# EAGLE board BMS Segment rev15 (EAGLE 9.6.2), part 1 of 2
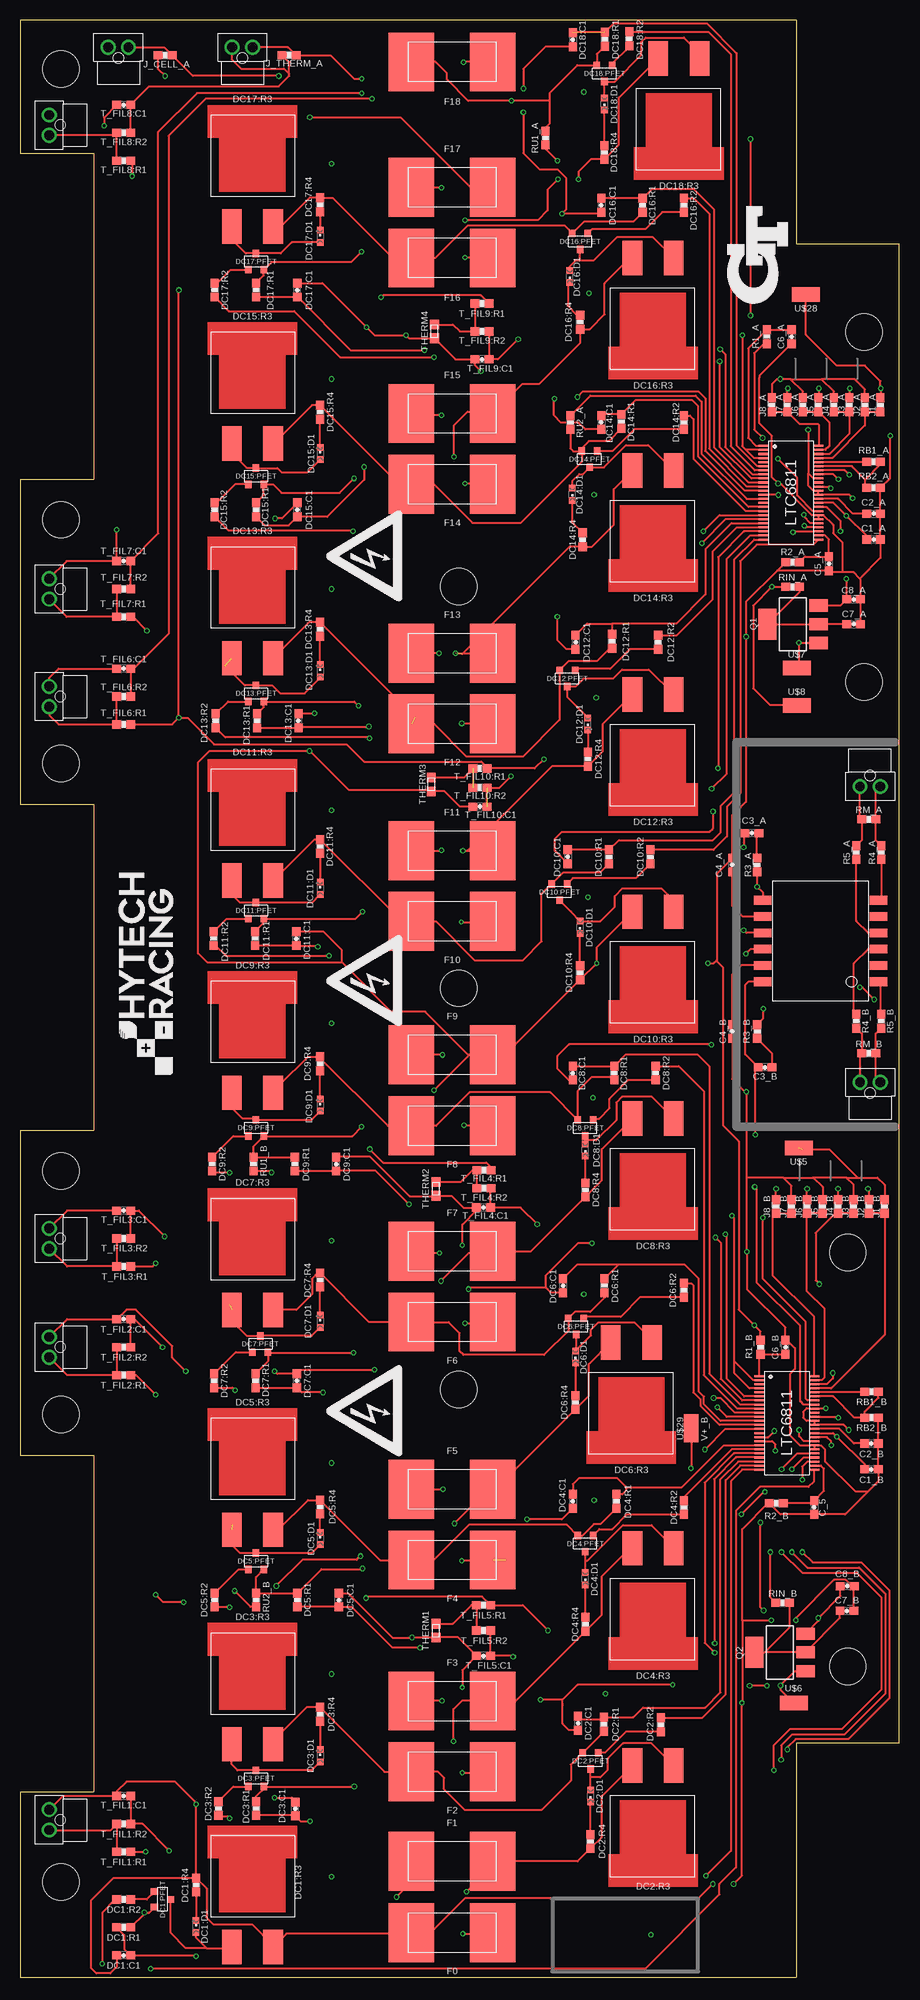
[diagram p0: board, top side]
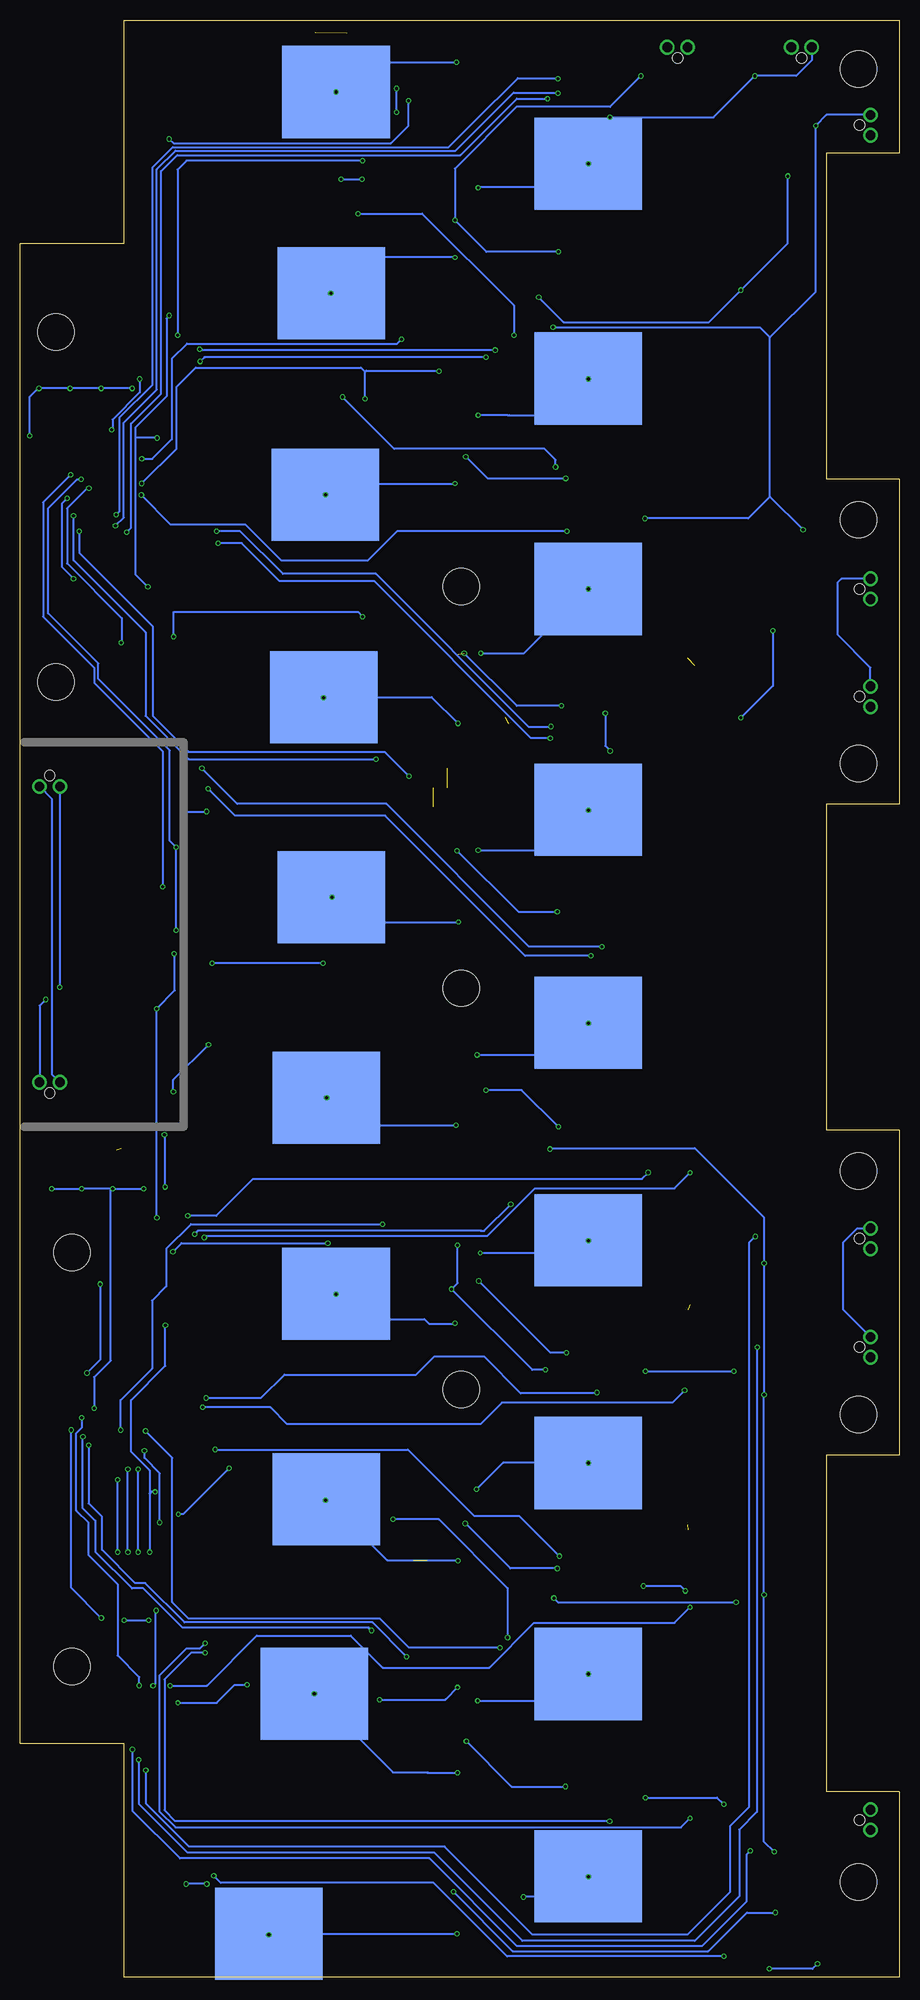
[diagram p1: board, bottom side, seen from below]

Size 108 x 240.25 mm. Coordinates in mm from the lower left corner, seen from the top.
Outline: 9,223.93 9,183.93 0,183.93 0,143.99 9,143.99 9,103.99 0,103.99 0,64.05 9,64.05 9,22.77 0,22.77 0,0 95.3,0 95.3,28.7 108,28.7 108,212.82 95.3,212.82 95.3,240.25 0,240.25 0,223.93 9,223.93
Copper layers (1*16): Top 0.035mm / dielectric 1.5mm / Bottom 0.035mm
Design rules "Advanced Circuits (2 Layer) *": minimum track width 5mil, minimum drill 10mil, track to track 5mil, track to pad 5mil, pad to pad 5mil, via to via 5mil, smd to smd 5mil, copper to edge 10mil, drill to drill 6mil, minimum pad ring 7mil, minimum via ring 5mil, stop-mask expansion 2.5mil, vias tented up to drill 30mil, thermal gap 10mil
Net classes: 1 unfused_hv: clearance 0.025 mm to class 0, clearance 3.2 mm

## Footprints (pad centres in the part's own frame; a part is rotated, then mirrored left to right if it is on the bottom)
NANO-FIT_VERTICAL-2 = drill 1.2: P$1 -1.25,0; P$2 1.25,0 | hole 1.3: 0,-1.34
0603-CAP = smd 1.1 x 1: 1 -0.85,0; 2 0.85,0
KEYSTONE5222 = smd 11.303 x 13.208: 1 0,0
LED-603 = smd 0.8 x 0.8: A 0,-0.75; C 0,0.75
SOT23 = smd 0.8 x 0.9: 1 -0.95,-1; 2 0.95,-1; 3 0,1
0603-RES@1 = smd 1.1 x 1: 1 -0.85,0; 2 0.85,0
PWR263 = smd 2.413 x 4.216: 1 0,0; 2 5.08,0
0885 = smd 5.6 x 7.23: 1 -5,0; 2 5,0
SOT223 = smd 1.5 x 2.235: 1 -2.3,-3.15; 2 0,-3.15; 3 2.3,-3.15 | smd 3.8 x 2.2: 4 0,3.15
0603 = smd 1.2 x 1.1: 1 -0.85,0; 2 0.85,0
HM2102NLT = smd 1.067 x 2.184: P$1 0,0; P$2 2,0; P$3 4,0; P$4 6,0; P$5 8,0; P$6 10,0; P$7 10,14.25; P$8 8,14.25; P$9 6,14.25; P$10 4,14.25; P$11 2,14.25; P$12 0,14.25
LTC6811 = smd 0.25 x 1.25: 1 -5.75,-3.37; 2 -5.25,-3.37; 3 -4.75,-3.37; 4 -4.25,-3.37; 5 -3.75,-3.37; 6 -3.25,-3.37; 7 -2.75,-3.37; 8 -2.25,-3.37; 9 -1.75,-3.37; 10 -1.25,-3.37; 11 -0.75,-3.37; 12 -0.25,-3.37; 13 0.25,-3.37; 14 0.75,-3.37; 15 1.25,-3.37; 16 1.75,-3.37; 17 2.25,-3.37; 18 2.75,-3.37; 19 3.25,-3.37; 20 3.75,-3.37; 21 4.25,-3.37; 22 4.75,-3.37; 23 5.25,-3.37; 24 5.75,-3.37; 25 5.75,3.38; 26 5.25,3.38; 27 4.75,3.38; 28 4.25,3.38; 29 3.75,3.38; 30 3.25,3.38; 31 2.75,3.38; 32 2.25,3.38; 33 1.75,3.38; 34 1.25,3.38; 35 0.75,3.38; 36 0.25,3.38; 37 -0.25,3.38; 38 -0.75,3.38; 39 -1.25,3.38; 40 -1.75,3.38; 41 -2.25,3.38; 42 -2.75,3.38; 43 -3.25,3.38; 44 -3.75,3.38; 45 -4.25,3.38; 46 -4.75,3.38; 47 -5.25,3.38; 48 -5.75,3.38
MICRO_MINIATURE = smd 3.429 x 1.778: 1 0,0
M4_MOUNTING = hole 4.5: 0,0

## Placement (x,y rotation side)
AMS_CELL_TEST  AMS_CELL_TEST  [NANO-FIT_VERTICAL-2]  12.03,236.95 0 top
AMS_THERM_TEST  AMS_THERM_TEST  [NANO-FIT_VERTICAL-2]  27.27,236.95 0 top
C1_A  1uF  [0603-CAP]  104.82,176.52 0 top
C1_B  1uF  [0603-CAP]  104.56,62.34 0 top
C2_A  1uF  [0603-CAP]  104.82,179.69 0 top
C2_B  1uF  [0603-CAP]  104.56,65.52 0 top
C3_A  15pF  [0603-CAP]  89.87,140.45 180 top
C3_B  15pF  [0603-CAP]  91.49,111.7 180 top
C4_A  10nF  [0603-CAP]  87.46,136.55 90 top
C4_B  10nF  [0603-CAP]  87.46,116.11 270 top
C5_A  10nF  [0603-CAP]  99.33,173.54 270 top
C6_A  100nF  [0603-CAP]  94.74,201.42 270 top
C6_B  100nF  [0603-CAP]  93.98,77.34 90 top
C7_A  100nF  [0603-CAP]  102.36,166.12 0 top
C7_B  100nF  [0603-CAP]  101.55,44.96 0 top
C8_A  1uF  [0603-CAP]  102.36,169.16 0 top
C8_B  1uF  [0603-CAP]  101.6,48.01 0 top
C_5  10nF  [0603-CAP]  97.54,57.66 270 top
CELL0  BATTERY_SPRING_KEYSTONE5222  [KEYSTONE5222]  77.47,5.33 270 bottom
CELL1  BATTERY_SPRING_KEYSTONE5222  [KEYSTONE5222]  38.23,12.38 270 bottom
CELL2  BATTERY_SPRING_KEYSTONE5222  [KEYSTONE5222]  71.88,34.8 270 bottom
CELL3  BATTERY_SPRING_KEYSTONE5222  [KEYSTONE5222]  38.23,37.21 270 bottom
CELL4  BATTERY_SPRING_KEYSTONE5222  [KEYSTONE5222]  70.42,58.67 270 bottom
CELL5  BATTERY_SPRING_KEYSTONE5222  [KEYSTONE5222]  38.23,63.12 270 bottom
CELL6  BATTERY_SPRING_KEYSTONE5222  [KEYSTONE5222]  69.22,83.88 270 bottom
CELL7  BATTERY_SPRING_KEYSTONE5222  [KEYSTONE5222]  38.23,90.49 270 bottom
CELL8  BATTERY_SPRING_KEYSTONE5222  [KEYSTONE5222]  70.42,107.95 270 bottom
CELL9  BATTERY_SPRING_KEYSTONE5222  [KEYSTONE5222]  38.23,117.16 270 bottom
CELL10  BATTERY_SPRING_KEYSTONE5222  [KEYSTONE5222]  69.79,132.59 270 bottom
CELL11  BATTERY_SPRING_KEYSTONE5222  [KEYSTONE5222]  38.23,143.32 270 bottom
CELL12  BATTERY_SPRING_KEYSTONE5222  [KEYSTONE5222]  70.74,157.16 270 bottom
CELL13  BATTERY_SPRING_KEYSTONE5222  [KEYSTONE5222]  38.23,170.43 270 bottom
CELL14  BATTERY_SPRING_KEYSTONE5222  [KEYSTONE5222]  70.55,181.99 270 bottom
CELL15  BATTERY_SPRING_KEYSTONE5222  [KEYSTONE5222]  38.23,196.28 270 bottom
CELL16  BATTERY_SPRING_KEYSTONE5222  [KEYSTONE5222]  69.79,206.76 270 bottom
CELL17  BATTERY_SPRING_KEYSTONE5222  [KEYSTONE5222]  38.23,222.63 270 bottom
CELL18  BATTERY_SPRING_KEYSTONE5222  [KEYSTONE5222]  69.22,231.46 270 bottom
DC1:C1  10nF  [0603-CAP]  12.7,2.67 180 top
DC1:D1  RED  [LED-603]  21.59,6.22 0 top
DC1:PFET  P-CHANNEL_MOSFET_DMP3099L-7  [SOT23]  17.48,9.53 270 top
DC1:R1  100R  [0603-RES@1]  12.7,6.1 180 top
DC1:R2  3K3  [0603-RES@1]  12.7,9.53 180 top
DC1:R3  RESISTOR_PWR263_  [PWR263]  25.97,3.68 0 top
DC1:R4  806R  [0603-RES@1]  21.59,11.3 270 top
DC2:C1  10nF  [0603-CAP]  68.52,31.18 270 top
DC2:D1  RED  [LED-603]  70.04,22.23 180 top
DC2:PFET  P-CHANNEL_MOSFET_DMP3099L-7  [SOT23]  70.04,26.54 180 top
DC2:R1  100R  [0603-RES@1]  71.69,31.05 90 top
DC2:R2  3K3  [0603-RES@1]  78.68,30.99 90 top
DC2:R3  RESISTOR_PWR263_  [PWR263]  80.26,25.97 180 top
DC2:R4  806R  [0603-RES@1]  70.04,16.64 90 top
DC3:C1  10nF  [0603-CAP]  33.78,20.64 90 top
DC3:D1  RED  [LED-603]  36.83,27.18 0 top
DC3:PFET  P-CHANNEL_MOSFET_DMP3099L-7  [SOT23]  28.96,24.38 0 top
DC3:R1  100R  [0603-RES@1]  28.96,20.7 270 top
DC3:R2  3K3  [0603-RES@1]  24.32,20.7 270 top
DC3:R3  RESISTOR_PWR263_  [PWR263]  25.97,28.57 0 top
DC3:R4  806R  [0603-RES@1]  36.83,32.26 270 top
DC4:C1  10nF  [0603-CAP]  67.88,58.42 270 top
DC4:D1  RED  [LED-603]  69.41,48.9 180 top
DC4:PFET  P-CHANNEL_MOSFET_DMP3099L-7  [SOT23]  69.41,53.21 180 top
DC4:R1  100R  [0603-RES@1]  73.22,58.42 90 top
DC4:R2  3K3  [0603-RES@1]  81.53,57.66 90 top
DC4:R3  RESISTOR_PWR263_  [PWR263]  80.26,52.64 180 top
DC4:R4  806R  [0603-RES@1]  69.41,43.31 90 top
DC5:C1  10nF  [0603-CAP]  39.12,46.29 90 top
DC5:D1  RED  [LED-603]  36.83,53.85 0 top
DC5:PFET  P-CHANNEL_MOSFET_DMP3099L-7  [SOT23]  28.96,51.05 0 top
DC5:R1  100R  [0603-RES@1]  34.04,46.29 270 top
DC5:R2  3K3  [0603-RES@1]  23.88,46.29 270 top
DC5:R3  RESISTOR_PWR263_  [PWR263]  25.97,54.93 0 top
DC5:R4  806R  [0603-RES@1]  36.83,57.72 270 top
DC6:C1  10nF  [0603-CAP]  66.67,84.9 270 top
DC6:D1  RED  [LED-603]  68.2,76.14 180 top
DC6:PFET  P-CHANNEL_MOSFET_DMP3099L-7  [SOT23]  68.26,79.88 180 top
DC6:R1  100R  [0603-RES@1]  71.75,84.9 90 top
DC6:R2  3K3  [0603-RES@1]  81.53,84.33 90 top
DC6:R3  RESISTOR_PWR263_  [PWR263]  77.6,77.91 180 top
DC6:R4  806R  [0603-RES@1]  68.2,70.55 90 top
DC7:C1  10nF  [0603-CAP]  33.97,73.22 90 top
DC7:D1  RED  [LED-603]  36.83,80.52 0 top
DC7:PFET  P-CHANNEL_MOSFET_DMP3099L-7  [SOT23]  29.46,77.72 0 top
DC7:R1  100R  [0603-RES@1]  28.89,73.22 270 top
DC7:R2  3K3  [0603-RES@1]  23.81,73.22 270 top
DC7:R3  RESISTOR_PWR263_  [PWR263]  25.97,81.92 0 top
DC7:R4  806R  [0603-RES@1]  36.83,85.6 270 top
DC8:C1  10nF  [0603-CAP]  67.88,111 270 top
DC8:D1  RED  [LED-603]  69.41,101.54 180 top
DC8:PFET  P-CHANNEL_MOSFET_DMP3099L-7  [SOT23]  69.41,104.27 180 top
DC8:R1  100R  [0603-RES@1]  72.96,111 90 top
DC8:R2  3K3  [0603-RES@1]  78.04,111 90 top
DC8:R3  RESISTOR_PWR263_  [PWR263]  80.26,105.41 180 top
DC8:R4  806R  [0603-RES@1]  69.41,96.65 90 top
DC9:C1  10nF  [0603-CAP]  38.8,99.82 90 top
DC9:D1  RED  [LED-603]  36.83,107.06 0 top
DC9:PFET  P-CHANNEL_MOSFET_DMP3099L-7  [SOT23]  28.96,104.27 0 top
DC9:R1  100R  [0603-RES@1]  33.72,99.82 270 top
DC9:R2  3K3  [0603-RES@1]  23.56,99.82 270 top
DC9:R3  RESISTOR_PWR263_  [PWR263]  25.97,108.58 0 top
DC9:R4  806R  [0603-RES@1]  36.83,112.14 270 top
DC10:C1  10nF  [0603-CAP]  67.25,137.54 270 top
DC10:D1  RED  [LED-603]  68.77,128.91 180 top
DC10:PFET  P-CHANNEL_MOSFET_DMP3099L-7  [SOT23]  66.23,133.22 180 top
DC10:R1  100R  [0603-RES@1]  72.33,137.54 90 top
DC10:R2  3K3  [0603-RES@1]  77.41,137.54 90 top
DC10:R3  RESISTOR_PWR263_  [PWR263]  80.26,130.81 180 top
DC10:R4  806R  [0603-RES@1]  68.77,123.32 90 top
DC11:C1  10nF  [0603-CAP]  33.91,127.51 90 top
DC11:D1  RED  [LED-603]  36.83,133.68 0 top
DC11:PFET  P-CHANNEL_MOSFET_DMP3099L-7  [SOT23]  28.96,130.94 0 top
DC11:R1  100R  [0603-RES@1]  28.83,127.51 270 top
DC11:R2  3K3  [0603-RES@1]  23.75,127.51 270 top
DC11:R3  RESISTOR_PWR263_  [PWR263]  25.97,134.62 0 top
DC11:R4  806R  [0603-RES@1]  36.83,138.81 270 top
DC12:C1  10nF  [0603-CAP]  68.2,163.89 270 top
DC12:D1  RED  [LED-603]  69.72,153.86 180 top
DC12:PFET  P-CHANNEL_MOSFET_DMP3099L-7  [SOT23]  67.18,159.45 180 top
DC12:R1  100R  [0603-RES@1]  72.71,164.02 90 top
DC12:R2  3K3  [0603-RES@1]  78.36,163.89 90 top
DC12:R3  RESISTOR_PWR263_  [PWR263]  80.26,157.48 180 top
DC12:R4  806R  [0603-RES@1]  69.72,149.54 90 top
DC13:C1  10nF  [0603-CAP]  34.16,154.24 90 top
DC13:D1  RED  [LED-603]  36.83,160.4 0 top
DC13:PFET  P-CHANNEL_MOSFET_DMP3099L-7  [SOT23]  28.96,157.61 0 top
DC13:R1  100R  [0603-RES@1]  29.08,154.24 270 top
DC13:R2  3K3  [0603-RES@1]  24,154.24 270 top
DC13:R3  RESISTOR_PWR263_  [PWR263]  25.97,161.93 0 top
DC13:R4  806R  [0603-RES@1]  36.83,165.48 270 top
DC14:C1  10nF  [0603-CAP]  71.37,190.88 270 top
DC14:D1  RED  [LED-603]  67.82,182.05 180 top
DC14:PFET  P-CHANNEL_MOSFET_DMP3099L-7  [SOT23]  69.91,186.37 180 top
DC14:R1  100R  [0603-RES@1]  73.85,191.01 90 top
DC14:R2  3K3  [0603-RES@1]  81.53,190.88 90 top
DC14:R3  RESISTOR_PWR263_  [PWR263]  80.26,184.98 180 top
DC14:R4  806R  [0603-RES@1]  69.09,176.47 90 top
DC15:C1  10nF  [0603-CAP]  34.04,180.15 90 top
DC15:D1  RED  [LED-603]  36.83,187.07 0 top
DC15:PFET  P-CHANNEL_MOSFET_DMP3099L-7  [SOT23]  28.96,184.28 0 top
DC15:R1  100R  [0603-RES@1]  28.96,180.15 270 top
DC15:R2  3K3  [0603-RES@1]  23.88,180.15 270 top
DC15:R3  RESISTOR_PWR263_  [PWR263]  25.97,188.28 0 top
DC15:R4  806R  [0603-RES@1]  36.83,192.15 270 top
DC16:C1  10nF  [0603-CAP]  71.37,217.55 270 top
DC16:D1  RED  [LED-603]  67.5,208.79 180 top
DC16:PFET  P-CHANNEL_MOSFET_DMP3099L-7  [SOT23]  68.77,213.11 180 top
DC16:R1  100R  [0603-RES@1]  76.45,217.55 90 top
DC16:R2  3K3  [0603-RES@1]  81.53,217.55 90 top
DC16:R3  RESISTOR_PWR263_  [PWR263]  80.26,211.07 180 top
DC16:R4  806R  [0603-RES@1]  68.77,203.2 90 top
DC17:C1  10nF  [0603-CAP]  34.04,207.14 90 top
DC17:D1  RED  [LED-603]  36.83,213.74 0 top
DC17:PFET  P-CHANNEL_MOSFET_DMP3099L-7  [SOT23]  28.96,210.63 0 top
DC17:R1  100R  [0603-RES@1]  28.96,207.14 270 top
DC17:R2  3K3  [0603-RES@1]  23.88,207.14 270 top
DC17:R3  RESISTOR_PWR263_  [PWR263]  25.97,214.95 0 top
DC17:R4  806R  [0603-RES@1]  36.83,217.61 270 top
DC18:C1  10nF  [0603-CAP]  67.88,237.87 270 top
DC18:D1  RED  [LED-603]  71.75,230 180 top
DC18:PFET  P-CHANNEL_MOSFET_DMP3099L-7  [SOT23]  71.75,233.74 180 top
DC18:R1  100R  [0603-RES@1]  71.82,237.93 90 top
DC18:R2  3K3  [0603-RES@1]  74.8,238 90 top
DC18:R3  RESISTOR_PWR263_  [PWR263]  83.44,235.59 180 top
DC18:R4  806R  [0603-RES@1]  71.75,224.03 90 top
F0  0001.2704.11  [0885]  53.05,5.46 180 top
F1  0001.2704.11  [0885]  53.05,14.21 0 top
F2  0001.2704.11  [0885]  53.05,25.21 180 top
F3  0001.2704.11  [0885]  53.05,33.89 0 top
F4  0001.2704.11  [0885]  53.05,51.21 180 top
F5  0001.2704.11  [0885]  53.05,59.89 0 top
F6  0001.2704.11  [0885]  53.05,80.43 180 top
F7  0001.2704.11  [0885]  53.05,89.11 0 top
F8  0001.2704.11  [0885]  53.05,104.51 180 top
F9  0001.2704.11  [0885]  53.05,113.25 0 top
F10  0001.2704.11  [0885]  53.05,129.62 180 top
F11  0001.2704.11  [0885]  53.05,138.3 0 top
F12  0001.2704.11  [0885]  53.05,153.89 180 top
F13  0001.2704.11  [0885]  53.05,162.56 0 top
F14  0001.2704.11  [0885]  53.05,183.3 180 top
F15  0001.2704.11  [0885]  53.05,191.98 0 top
F16  0001.2704.11  [0885]  53.05,211.08 180 top
F17  0001.2704.11  [0885]  53.05,219.76 0 top
F18  0001.2704.11  [0885]  53.05,235.15 180 top
ISOSPI_A  ISOSPI  [NANO-FIT_VERTICAL-2]  104.39,146.19 180 top
ISOSPI_B  ISOSPI  [NANO-FIT_VERTICAL-2]  104.39,109.87 0 top
J1_A  0R  [0603-RES@1]  105.66,193.04 90 top
J1_B  0R  [0603-RES@1]  106.17,94.61 90 top
J2_A  0R  [0603-RES@1]  103.76,193.04 90 top
J2_B  0R  [0603-RES@1]  104.27,94.61 90 top
J3_A  0R  [0603-RES@1]  101.85,193.04 90 top
J3_B  0R  [0603-RES@1]  102.36,94.61 90 top
J4_A  0R  [0603-RES@1]  99.95,193.04 90 top
J4_B  0R  [0603-RES@1]  100.46,94.61 90 top
J5_A  0R  [0603-RES@1]  98.04,193.04 90 top
J5_B  0R  [0603-RES@1]  98.55,94.61 90 top
J6_A  0R  [0603-RES@1]  96.14,193.04 90 top
J6_B  0R  [0603-RES@1]  96.65,94.61 90 top
J7_A  0R  [0603-RES@1]  94.23,193.04 90 top
J7_B  0R  [0603-RES@1]  94.74,94.61 90 top
J8_A  0R  [0603-RES@1]  92.33,193.04 90 top
J8_B  0R  [0603-RES@1]  92.84,94.61 90 top
J_CELL_A  0R  [0603-RES@1]  17.78,235.97 0 top
J_THERM_A  0R  [0603-RES@1]  33.02,235.97 180 top
Q1  NSV1C201MZ4  [SOT223]  94.91,166.1 90 top
Q2  NSV1C201MZ4  [SOT223]  93.32,39.86 90 top
R1_A  100R  [0603-RES@1]  91.69,201.42 90 top
R1_B  100R  [0603-RES@1]  90.93,77.34 270 top
R2_A  100R  [0603-RES@1]  94.87,173.74 0 top
R2_B  100R  [0603-RES@1]  92.88,58.17 0 top
R3_A  402R  [0603-RES@1]  90.51,136.55 90 top
R3_B  402R  [0603-RES@1]  90.51,116.11 270 top
R4_A  22R  [0603-RES@1]  105.75,138.08 90 top
R4_B  22R  [0603-RES@1]  102.7,117.38 270 top
R5_A  22R  [0603-RES@1]  102.7,138.08 90 top
R5_B  22R  [0603-RES@1]  105.75,117.38 270 top
RB1_A  1K2  [0603-RES@1]  104.82,186.04 180 top
RB1_B  1K2  [0603-RES@1]  104.56,71.87 180 top
RB2_A  806R  [0603-RES@1]  104.82,182.87 180 top
RB2_B  806R  [0603-RES@1]  104.56,68.69 180 top
RIN_A  100R  [0603-RES@1]  94.87,170.69 0 top
RIN_B  100R  [0603-RES@1]  93.64,45.97 0 top
RM_A  100R  [0603-RES@1]  104.22,142.14 180 top
RM_B  100R  [0603-RES@1]  104.22,113.44 0 top
RU1_A  100R  [0603-RES@1]  64.52,225.81 270 top
RU1_B  100R  [0603-RES@1]  28.64,99.82 270 top
RU2_A  100R  [0603-RES@1]  67.56,190.88 90 top
RU2_B  100R  [0603-RES@1]  28.96,46.29 270 top
T_FIL1:C1  10nF  [0603-CAP]  12.7,22.23 180 top
T_FIL1:R1  10K  [0603-RES@1]  12.7,15.37 180 top
T_FIL1:R2  100R  [0603-RES@1]  12.7,18.8 180 top
T_FIL2:C1  10nF  [0603-CAP]  12.7,80.77 180 top
T_FIL2:R1  10K  [0603-RES@1]  12.7,73.91 180 top
T_FIL2:R2  100R  [0603-RES@1]  12.7,77.34 180 top
T_FIL3:C1  10nF  [0603-CAP]  12.7,94.11 180 top
T_FIL3:R1  10K  [0603-RES@1]  12.7,87.25 180 top
T_FIL3:R2  100R  [0603-RES@1]  12.7,90.68 180 top
T_FIL4:C1  10nF  [0603-CAP]  56.9,94.49 180 top
T_FIL4:R1  10K  [0603-RES@1]  56.96,99.06 180 top
T_FIL4:R2  100R  [0603-RES@1]  56.96,96.84 180 top
T_FIL5:C1  10nF  [0603-CAP]  56.9,39.43 180 top
T_FIL5:R1  10K  [0603-RES@1]  56.9,45.66 180 top
T_FIL5:R2  100R  [0603-RES@1]  56.9,42.55 180 top
T_FIL6:C1  10nF  [0603-CAP]  12.7,160.66 180 top
T_FIL6:R1  10K  [0603-RES@1]  12.7,153.8 180 top
T_FIL6:R2  100R  [0603-RES@1]  12.7,157.23 180 top
T_FIL7:C1  10nF  [0603-CAP]  12.7,173.86 180 top
T_FIL7:R1  10K  [0603-RES@1]  12.7,167 180 top
T_FIL7:R2  100R  [0603-RES@1]  12.7,170.43 180 top
T_FIL8:C1  10nF  [0603-CAP]  12.7,229.87 180 top
T_FIL8:R1  10K  [0603-RES@1]  12.7,223.01 180 top
T_FIL8:R2  100R  [0603-RES@1]  12.7,226.44 180 top
T_FIL9:C1  10nF  [0603-CAP]  56.71,198.63 180 top
T_FIL9:R1  10K  [0603-RES@1]  56.71,205.49 180 top
T_FIL9:R2  100R  [0603-RES@1]  56.71,202.06 180 top
T_FIL10:C1  10nF  [0603-CAP]  56.45,143.7 180 top
T_FIL10:R1  10K  [0603-RES@1]  56.45,148.4 180 top
T_FIL10:R2  100R  [0603-RES@1]  56.45,146.05 180 top
THERM1  10K  [0603]  51.05,42.55 90 top
THERM1_A  THERMISTOR  [NANO-FIT_VERTICAL-2]  3.56,157.23 90 top
THERM1_B  THERMISTOR  [NANO-FIT_VERTICAL-2]  3.56,19.3 90 top
THERM2  10K  [0603]  51.05,96.77 90 top
THERM2_A  THERMISTOR  [NANO-FIT_VERTICAL-2]  3.56,170.43 90 top
THERM2_B  THERMISTOR  [NANO-FIT_VERTICAL-2]  3.56,77.34 90 top
THERM3  10K  [0603]  50.48,146.43 90 top
THERM3_A  THERMISTOR  [NANO-FIT_VERTICAL-2]  3.56,227.39 90 top
THERM3_B  THERMISTOR  [NANO-FIT_VERTICAL-2]  3.56,90.68 90 top
THERM4  10K  [0603]  50.86,202.06 90 top
TRANSFORMER  HM2102NLT  [HM2102NLT]  105.44,122.21 90 top
U1  LTC6811-2  [LTC6811]  94.66,182.26 270 top
U2  LTC6811-2  [LTC6811]  94.15,68.05 270 top
U$1  [LOGO_HYTECH_1.0"]  19.05,110.49 90 top
U$2  [LOGO_GT_0.50"]  90.55,211.46 90 top
U$3  [HV_1.00"]  42.23,122.36 90 top
U$4  [HV_1.00"]  42.23,69.53 90 top
U$5  TEST_POINTMICRO_MINIATURE  [MICRO_MINIATURE]  95.63,101.79 180 top
U$6  TEST_POINTMICRO_MINIATURE  [MICRO_MINIATURE]  95,33.66 180 top
U$7  TEST_POINTMICRO_MINIATURE  [MICRO_MINIATURE]  95.38,160.72 0 top
U$8  TEST_POINTMICRO_MINIATURE  [MICRO_MINIATURE]  95.38,156.15 0 top
U$9  [M4_MOUNTING]  53.85,170.71 0 top
U$10  [M4_MOUNTING]  5,178.94 0 top
U$11  [M4_MOUNTING]  5,98.99 0 top
U$12  [M4_MOUNTING]  5,69.05 0 top
U$13  [M4_MOUNTING]  5,11.67 0 top
U$14  [M4_MOUNTING]  101.65,38.11 0 top
U$15  [M4_MOUNTING]  103.65,201.99 0 top
U$16  [M4_MOUNTING]  103.65,158.99 0 top
U$17  [M4_MOUNTING]  101.65,88.99 0 top
U$18  [M4_MOUNTING]  53.85,72.14 0 top
U$19  [M4_MOUNTING]  53.85,121.41 0 top
U$20  [HV_1.00"]  42.23,174.5 90 top
U$21  [NUMBER]  65.34,0.7 0 top
U$26  [M4_MOUNTING]  5,234.28 0 top
U$27  [M4_MOUNTING]  5,148.99 0 top
U$28  TEST_POINTMICRO_MINIATURE  [MICRO_MINIATURE]  96.52,206.57 180 top
U$29  TEST_POINTMICRO_MINIATURE  [MICRO_MINIATURE]  82.42,67.37 90 top

## Library data of the parts
AMS_CELL_TEST AMS_THERM_TEST DC1:PFET DC2:PFET DC3:PFET DC4:PFET DC5:PFET DC6:PFET DC7:PFET DC8:PFET DC9:PFET DC10:PFET DC11:PFET DC12:PFET DC13:PFET DC14:PFET DC15:PFET DC16:PFET DC17:PFET DC18:PFET ISOSPI_A ISOSPI_B Q1 Q2 THERM1 THERM1_A THERM1_B THERM2 THERM2_A THERM2_B THERM3 THERM3_A THERM3_B THERM4 TRANSFORMER U1 U2 U$9-U$19 U$26 U$27 = HyTechDevices
C1_A C1_B C2_A C2_B C3_A C3_B C4_A C4_B C5_A C8_A C8_B C_5 DC1:C1 DC2:C1 DC3:C1 DC4:C1 DC5:C1 DC6:C1 DC7:C1 DC8:C1 DC9:C1 DC10:C1 DC11:C1 DC12:C1 DC13:C1 DC14:C1 DC15:C1 DC16:C1 DC17:C1 DC18:C1 T_FIL1:C1 T_FIL2:C1 T_FIL3:C1 T_FIL4:C1 T_FIL5:C1 T_FIL6:C1 T_FIL7:C1 T_FIL8:C1 T_FIL9:C1 T_FIL10:C1 = HyTechDevices; TOLERANCE: 5%; VOLTAGE: 10V
C6_A C6_B C7_A C7_B = HyTechDevices; TOLERANCE: 5%; VOLTAGE: 50V
CELL0 CELL1-CELL18 U$5-U$8 U$28 U$29 = HyTechDevices - Copy
DC1:D1 DC2:D1 DC3:D1 DC4:D1 DC5:D1 DC6:D1 DC7:D1 DC8:D1 DC9:D1 DC10:D1 DC11:D1 DC12:D1 DC13:D1 DC14:D1 DC15:D1 DC16:D1 DC17:D1 DC18:D1 = HyTechDevices; DKPN: 350-2038-1-ND
DC1:R1 DC1:R2 DC1:R4 DC2:R1 DC2:R2 DC2:R4 DC3:R1 DC3:R2 DC3:R4 DC4:R1 DC4:R2 DC4:R4 DC5:R1 DC5:R2 DC5:R4 DC6:R1 DC6:R2 DC6:R4 DC7:R1 DC7:R2 DC7:R4 DC8:R1 DC8:R2 DC8:R4 DC9:R1 DC9:R2 DC9:R4 DC10:R1 DC10:R2 DC10:R4 DC11:R1 DC11:R2 DC11:R4 DC12:R1 DC12:R2 DC12:R4 DC13:R1 DC13:R2 DC13:R4 DC14:R1 DC14:R2 DC14:R4 DC15:R1 DC15:R2 DC15:R4 DC16:R1 DC16:R2 DC16:R4 DC17:R1 DC17:R2 DC17:R4 DC18:R1 DC18:R2 DC18:R4 J1_A J1_B J2_A J2_B J3_A J3_B J4_A J4_B J5_A J5_B J6_A J6_B J7_A J7_B J8_A J8_B R1_A R1_B R2_A R2_B R3_A R3_B R4_A R4_B R5_A R5_B RB1_A RB1_B RB2_A RB2_B RIN_A RIN_B RU1_A RU1_B RU2_A RU2_B T_FIL1:R1 T_FIL1:R2 T_FIL2:R1 T_FIL2:R2 T_FIL3:R1 T_FIL3:R2 T_FIL4:R1 T_FIL4:R2 T_FIL5:R1 T_FIL5:R2 T_FIL6:R1 T_FIL6:R2 T_FIL7:R1 T_FIL7:R2 T_FIL8:R1 T_FIL8:R2 T_FIL9:R1 T_FIL9:R2 T_FIL10:R1 T_FIL10:R2 = HyTechDevices; TOLERANCE: 1%
DC1:R3 DC2:R3 DC3:R3 DC4:R3 DC5:R3 DC6:R3 DC7:R3 DC8:R3 DC9:R3 DC10:R3 DC11:R3 DC12:R3 DC13:R3 DC14:R3 DC15:R3 DC16:R3 DC17:R3 DC18:R3 = HyTechDevices; RESISTANCE: 5R
F0 F1-F18 = HyTechDevices; CURRENT: 1.25A; DKPN: F10986CT-ND; MANUFACTURER: Littelfuse Inc.; MOPN: 576-08851.25DR; MPN: 08851.25DR; RATING: 1A
J_CELL_A J_THERM_A = HyTechDevices; TOLERANCE: 1%; TYPE: JUMPER
RM_A RM_B = HyTechDevices; TOLERANCE: 1%; TYPE: TERMINATION
U$1-U$4 U$20 U$21 = HyTechAesthetics

## Nets
C0_A: C5_A.1 R2_A.2 U1.26
C0_B: C_5.1 R2_B.2 U2.26
C1_A: DC10:C1.1 DC10:R1.2 U1.24
C1_B: DC1:C1.1 DC1:R1.2 U2.24
C2_A: DC11:C1.1 DC11:R1.2 U1.22
C2_B: DC2:C1.1 DC2:R1.2 U2.22
C3_A: DC12:C1.1 DC12:R1.2 U1.20
C3_B: DC3:C1.1 DC3:R1.2 U2.20
C4_A: DC13:C1.1 DC13:R1.2 U1.18
C4_B: DC4:C1.1 DC4:R1.2 U2.18
C5_A: DC14:C1.1 DC14:R1.2 U1.16
C5_B: DC5:C1.1 DC5:R1.2 U2.16
C7_A: DC15:C1.1 DC15:R1.2 U1.12
C7_B: DC6:C1.1 DC6:R1.2 U2.12
C8_A: DC16:C1.1 DC16:R1.2 U1.10
C8_B: DC7:C1.1 DC7:R1.2 U2.10
C9_A: DC17:C1.1 DC17:R1.2 U1.8
C9_B: DC8:C1.1 DC8:R1.2 U2.8
C10_A: DC18:C1.1 DC18:R1.2 U1.6
C10_B: DC9:C1.1 DC9:R1.2 U2.6
CC0 [unfused_hv]: CELL0.1 F0.1
CC1 [unfused_hv]: CELL1.1 F1.1
CC2 [unfused_hv]: CELL2.1 F2.1
CC3 [unfused_hv]: CELL3.1 F3.1
CC4 [unfused_hv]: CELL4.1 F4.1
CC5 [unfused_hv]: CELL5.1 F5.1
CC6 [unfused_hv]: CELL6.1 F6.1
CC7 [unfused_hv]: CELL7.1 F7.1
CC8 [unfused_hv]: CELL8.1 F8.1
CC9 [unfused_hv]: CELL9.1 F9.1
CC10 [unfused_hv]: CELL10.1 F10.1
CC11 [unfused_hv]: CELL11.1 F11.1
CC12 [unfused_hv]: CELL12.1 F12.1
CC13 [unfused_hv]: CELL13.1 F13.1
CC14 [unfused_hv]: CELL14.1 F14.1
CC15 [unfused_hv]: CELL15.1 F15.1
CC16 [unfused_hv]: CELL16.1 F16.1
CC17 [unfused_hv]: CELL17.1 F17.1
CC18 [unfused_hv]: CELL18.1 F18.1
DC1:GATE: DC1:PFET.1 DC1:R2.1
DC1:N$1: DC1:D1.A DC1:PFET.3 DC1:R3.1
DC1:N$2: DC1:D1.C DC1:R4.2
DC2:GATE: DC2:PFET.1 DC2:R2.1
DC2:N$1: DC2:D1.A DC2:PFET.3 DC2:R3.1
DC2:N$2: DC2:D1.C DC2:R4.2
DC3:GATE: DC3:PFET.1 DC3:R2.1
DC3:N$1: DC3:D1.A DC3:PFET.3 DC3:R3.1
DC3:N$2: DC3:D1.C DC3:R4.2
DC4:GATE: DC4:PFET.1 DC4:R2.1
DC4:N$1: DC4:D1.A DC4:PFET.3 DC4:R3.1
DC4:N$2: DC4:D1.C DC4:R4.2
DC5:GATE: DC5:PFET.1 DC5:R2.1
DC5:N$1: DC5:D1.A DC5:PFET.3 DC5:R3.1
DC5:N$2: DC5:D1.C DC5:R4.2
DC6:GATE: DC6:PFET.1 DC6:R2.1
DC6:N$1: DC6:D1.A DC6:PFET.3 DC6:R3.1
DC6:N$2: DC6:D1.C DC6:R4.2
DC7:GATE: DC7:PFET.1 DC7:R2.1
DC7:N$1: DC7:D1.A DC7:PFET.3 DC7:R3.1
DC7:N$2: DC7:D1.C DC7:R4.2
DC8:GATE: DC8:PFET.1 DC8:R2.1
DC8:N$1: DC8:D1.A DC8:PFET.3 DC8:R3.1
DC8:N$2: DC8:D1.C DC8:R4.2
DC9:GATE: DC9:PFET.1 DC9:R2.1
DC9:N$1: DC9:D1.A DC9:PFET.3 DC9:R3.1
DC9:N$2: DC9:D1.C DC9:R4.2
DC10:GATE: DC10:PFET.1 DC10:R2.1
DC10:N$1: DC10:D1.A DC10:PFET.3 DC10:R3.1
DC10:N$2: DC10:D1.C DC10:R4.2
DC11:GATE: DC11:PFET.1 DC11:R2.1
DC11:N$1: DC11:D1.A DC11:PFET.3 DC11:R3.1
DC11:N$2: DC11:D1.C DC11:R4.2
DC12:GATE: DC12:PFET.1 DC12:R2.1
DC12:N$1: DC12:D1.A DC12:PFET.3 DC12:R3.1
DC12:N$2: DC12:D1.C DC12:R4.2
DC13:GATE: DC13:PFET.1 DC13:R2.1
DC13:N$1: DC13:D1.A DC13:PFET.3 DC13:R3.1
DC13:N$2: DC13:D1.C DC13:R4.2
DC14:GATE: DC14:PFET.1 DC14:R2.1
DC14:N$1: DC14:D1.A DC14:PFET.3 DC14:R3.1
DC14:N$2: DC14:D1.C DC14:R4.2
DC15:GATE: DC15:PFET.1 DC15:R2.1
DC15:N$1: DC15:D1.A DC15:PFET.3 DC15:R3.1
DC15:N$2: DC15:D1.C DC15:R4.2
DC16:GATE: DC16:PFET.1 DC16:R2.1
DC16:N$1: DC16:D1.A DC16:PFET.3 DC16:R3.1
DC16:N$2: DC16:D1.C DC16:R4.2
DC17:GATE: DC17:PFET.1 DC17:R2.1
DC17:N$1: DC17:D1.A DC17:PFET.3 DC17:R3.1
DC17:N$2: DC17:D1.C DC17:R4.2
DC18:GATE: DC18:PFET.1 DC18:R2.1
DC18:N$1: DC18:D1.A DC18:PFET.3 DC18:R3.1
DC18:N$2: DC18:D1.C DC18:R4.2
DRIVE_A: Q1.1 U1.38 U$7.1
DRIVE_B: Q2.1 U2.38 U$6.1
GPIO1_A: T_FIL6:C1.1 T_FIL6:R2.1 U1.27
GPIO1_B: T_FIL1:C1.1 T_FIL1:R2.1 U2.27
GPIO2_A: T_FIL7:C1.1 T_FIL7:R2.1 U1.28
GPIO2_B: T_FIL2:C1.1 T_FIL2:R2.1 U2.28
GPIO3_A_POST: AMS_THERM_TEST.P$2 J_THERM_A.1 U1.29
GPIO3_A_PRE: AMS_THERM_TEST.P$1 J_THERM_A.2 T_FIL8:C1.1 T_FIL8:R2.1
GPIO3_B: T_FIL3:C1.1 T_FIL3:R2.1 U2.29
GPIO4_A: T_FIL9:C1.1 T_FIL9:R2.1 U1.32
GPIO4_B: T_FIL4:C1.1 T_FIL4:R2.1 U2.32
GPIO5_A: T_FIL10:C1.1 T_FIL10:R2.1 U1.33
GPIO5_B: T_FIL5:C1.1 T_FIL5:R2.1 U2.33
IM_A: C3_A.2 TRANSFORMER.P$9 U1.41
IM_B: C3_B.2 TRANSFORMER.P$12 U2.41
IP_A: R3_A.1 TRANSFORMER.P$7 U1.42
IP_B: R3_B.1 TRANSFORMER.P$10 U2.42
ISOSPI-M: ISOSPI_A.P$2 ISOSPI_B.P$2 R5_A.2 R5_B.2 RM_A.2 RM_B.2
ISOSPI-P: ISOSPI_A.P$1 ISOSPI_B.P$1 R4_A.2 R4_B.2 RM_A.1 RM_B.1
N$1: C4_B.1 TRANSFORMER.P$11
N$2: RB1_B.2 U2.44
N$3: T_FIL1:R1.2 T_FIL1:R2.2 THERM1_B.P$1
N$4: RB1_B.1 RB2_B.2 U2.43
N$5: R4_B.1 TRANSFORMER.P$3
N$6: RB1_A.2 U1.44
N$7: R5_B.1 TRANSFORMER.P$1
N$8: J7_B.1 J8_B.1 U2.48
N$9: J5_B.1 J6_B.1 U2.47
N$10: C3_B.1 R3_B.2
N$13: J3_B.1 J4_B.1 U2.46
N$16: J1_B.1 J2_B.1 U2.45
N$17: T_FIL5:R1.2 T_FIL5:R2.2 THERM1.2
N$18: T_FIL2:R1.2 T_FIL2:R2.2 THERM2_B.P$1
N$19: T_FIL4:R1.2 T_FIL4:R2.2 THERM2.2
N$20: RB1_A.1 RB2_A.2 U1.43
N$21: C4_A.1 TRANSFORMER.P$8
N$22: R4_A.1 TRANSFORMER.P$6
N$23: R5_A.1 TRANSFORMER.P$4
N$24: C3_A.1 R3_A.2
N$26: T_FIL3:R1.2 T_FIL3:R2.2 THERM3_B.P$1
N$30: J7_A.1 J8_A.1 U1.48
N$31: J5_A.1 J6_A.1 U1.47
N$32: J3_A.1 J4_A.1 U1.46
N$33: J1_A.1 J2_A.1 U1.45
N$34: T_FIL9:R1.2 T_FIL9:R2.2 THERM4.2
N$35: T_FIL8:R1.2 T_FIL8:R2.2 THERM3_A.P$1
N$36: T_FIL10:R1.2 T_FIL10:R2.2 THERM3.2
N$37: T_FIL7:R1.2 T_FIL7:R2.2 THERM2_A.P$1
N$38: T_FIL6:R1.2 T_FIL6:R2.2 THERM1_A.P$1
S1_A: DC10:R2.2 U1.25
S1_B: DC1:R2.2 U2.25
S2_A: DC11:R2.2 U1.23
S2_B: DC2:R2.2 U2.23
S3_A: DC12:R2.2 U1.21
S3_B: DC3:R2.2 U2.21
S4_A: DC13:R2.2 U1.19
S4_B: DC4:R2.2 U2.19
S5_A: DC14:R2.2 U1.17
S5_B: DC5:R2.2 U2.17
S7_A: DC15:R2.2 U1.13
S7_B: DC6:R2.2 U2.13
S8_A: DC16:R2.2 U1.11
S8_B: DC7:R2.2 U2.11
S9_A: DC17:R2.2 U1.9
S9_B: DC8:R2.2 U2.9
S10_A: DC18:R2.2 U1.7
S10_B: DC9:R2.2 U2.7
SENSE1: DC1:PFET.2 DC1:R1.1 DC2:R3.2 DC2:R4.1 F1.2
SENSE2: DC2:PFET.2 DC2:R1.1 DC3:R3.2 DC3:R4.1 F2.2
SENSE3: DC3:PFET.2 DC3:R1.1 DC4:R3.2 DC4:R4.1 F3.2
SENSE4: DC4:PFET.2 DC4:R1.1 DC5:R3.2 DC5:R4.1 F4.2
SENSE5: DC5:PFET.2 DC5:R1.1 DC6:R3.2 DC6:R4.1 F5.2 RU2_B.1
SENSE6: DC6:PFET.2 DC6:R1.1 DC7:R3.2 DC7:R4.1 F6.2
SENSE7: DC7:PFET.2 DC7:R1.1 DC8:R3.2 DC8:R4.1 F7.2
SENSE8: DC8:PFET.2 DC8:R1.1 DC9:R3.2 DC9:R4.1 F8.2
SENSE10: DC10:PFET.2 DC10:R1.1 DC11:R3.2 DC11:R4.1 F10.2
SENSE11: DC11:PFET.2 DC11:R1.1 DC12:R3.2 DC12:R4.1 F11.2
SENSE12: DC12:PFET.2 DC12:R1.1 DC13:R3.2 DC13:R4.1 F12.2
SENSE13: DC13:PFET.2 DC13:R1.1 DC14:R3.2 DC14:R4.1 F13.2
SENSE14: DC14:PFET.2 DC14:R1.1 DC15:R3.2 DC15:R4.1 F14.2 RU2_A.1
SENSE15: DC15:PFET.2 DC15:R1.1 DC16:R3.2 DC16:R4.1 F15.2
SENSE16: DC16:PFET.2 DC16:R1.1 DC17:R3.2 DC17:R4.1 F16.2
SENSE17_POST: AMS_CELL_TEST.P$2 DC17:PFET.2 DC17:R1.1 DC18:R3.2 DC18:R4.1 J_CELL_A.2
SENSE17_PRE: AMS_CELL_TEST.P$1 F17.2 J_CELL_A.1
SENSE18: DC18:PFET.2 DC18:R1.1 F18.2 R1_A.1 RIN_A.1 RU1_A.1 U$8.1
UNUSED1_A: RU1_A.2 U1.2 U1.4
UNUSED1_B: RU1_B.2 U2.2 U2.4
UNUSED2_A: RU2_A.2 U1.14
UNUSED2_B: RU2_B.2 U2.14
V+_A: C6_A.1 R1_A.2 U1.1
V+_B: C6_B.1 R1_B.2 U2.1
V-_A: C1_A.2 C2_A.2 C4_A.2 C5_A.2 C6_A.2 C7_A.2 C8_A.2 DC9:PFET.2 DC9:R1.1 DC10:C1.2 DC10:R3.2 DC10:R4.1 DC11:C1.2 DC12:C1.2 DC13:C1.2 DC14:C1.2 DC15:C1.2 DC16:C1.2 DC17:C1.2 DC18:C1.2 F9.2 J1_A.2 J3_A.2 J5_A.2 J7_A.2 R1_B.1 R2_A.1 RB2_A.1 RIN_B.1 RU1_B.1 T_FIL6:C1.2 T_FIL7:C1.2 T_FIL8:C1.2 T_FIL9:C1.2 T_FIL10:C1.2 THERM1_A.P$2 THERM2_A.P$2 THERM3.1 THERM3_A.P$2 THERM4.1 U1.30 U1.31 U$28.1 U$29.1
V-_B: C1_B.2 C2_B.2 C4_B.2 C6_B.2 C7_B.2 C8_B.2 C_5.2 DC1:C1.2 DC1:R3.2 DC1:R4.1 DC2:C1.2 DC3:C1.2 DC4:C1.2 DC5:C1.2 DC6:C1.2 DC7:C1.2 DC8:C1.2 DC9:C1.2 F0.2 J1_B.2 J3_B.2 J5_B.2 J7_B.2 R2_B.1 RB2_B.1 T_FIL1:C1.2 T_FIL2:C1.2 T_FIL3:C1.2 T_FIL4:C1.2 T_FIL5:C1.2 THERM1.1 THERM1_B.P$2 THERM2.1 THERM2_B.P$2 THERM3_B.P$2 U2.30 U2.31 U$5.1
VIN_A: C7_A.1 Q1.2 Q1.4 RIN_A.2
VIN_B: C7_B.1 Q2.2 Q2.4 RIN_B.2
VREF1_A: C2_A.1 U1.35
VREF1_B: C2_B.1 U2.35
VREF2_A: C1_A.1 T_FIL6:R1.1 T_FIL7:R1.1 T_FIL8:R1.1 T_FIL9:R1.1 T_FIL10:R1.1 U1.34
VREF2_B: C1_B.1 T_FIL1:R1.1 T_FIL2:R1.1 T_FIL3:R1.1 T_FIL4:R1.1 T_FIL5:R1.1 U2.34
VREG_A: C8_A.1 J2_A.2 J4_A.2 J6_A.2 J8_A.2 Q1.3 U1.36 U1.37 U1.40
VREG_B: C8_B.1 J2_B.2 J4_B.2 J6_B.2 J8_B.2 Q2.3 U2.36 U2.37 U2.40